# EAGLE board VHF-Superregen-2-Transistor-old (EAGLE 7.6.0)
A Superregen Receiver for FM broadcast or Aircraft band AM reception http://www.ke3ij.com/superrgn.htm
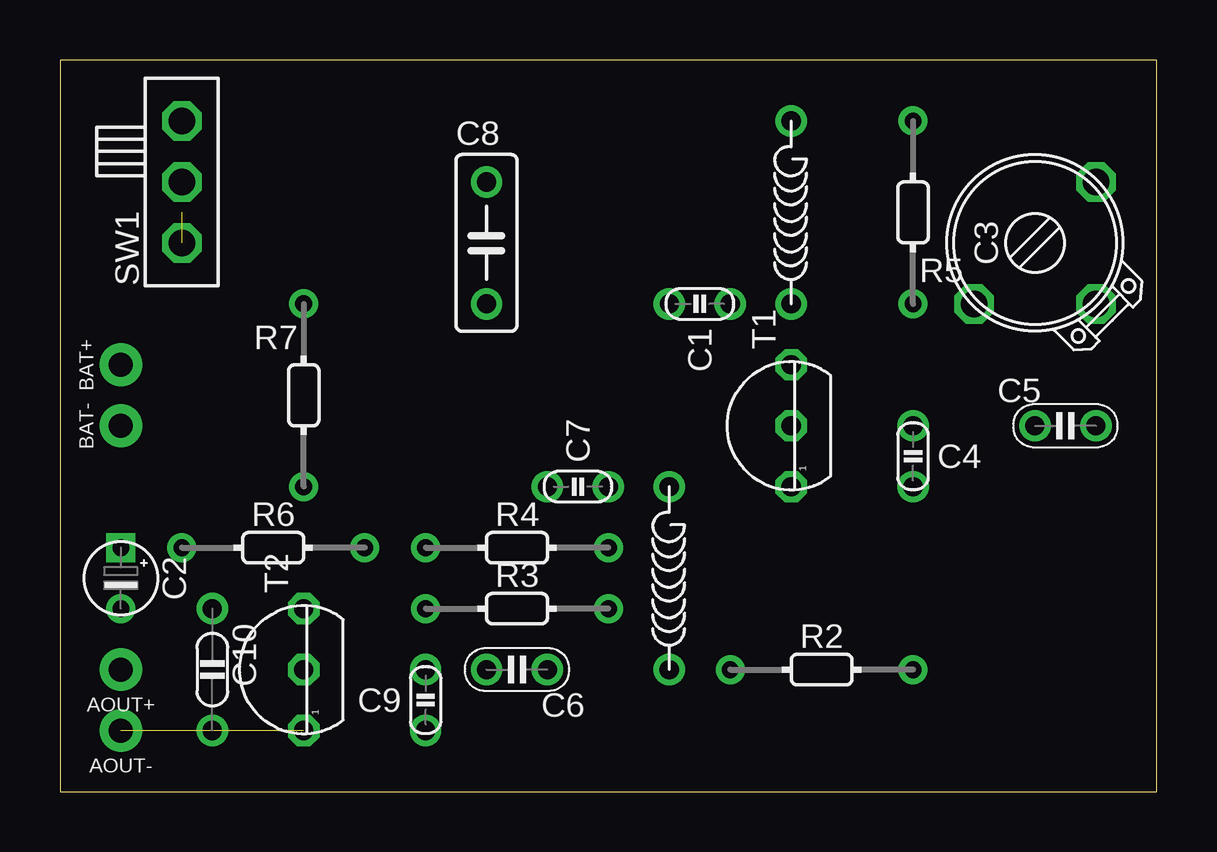
[diagram p0: board, top side]
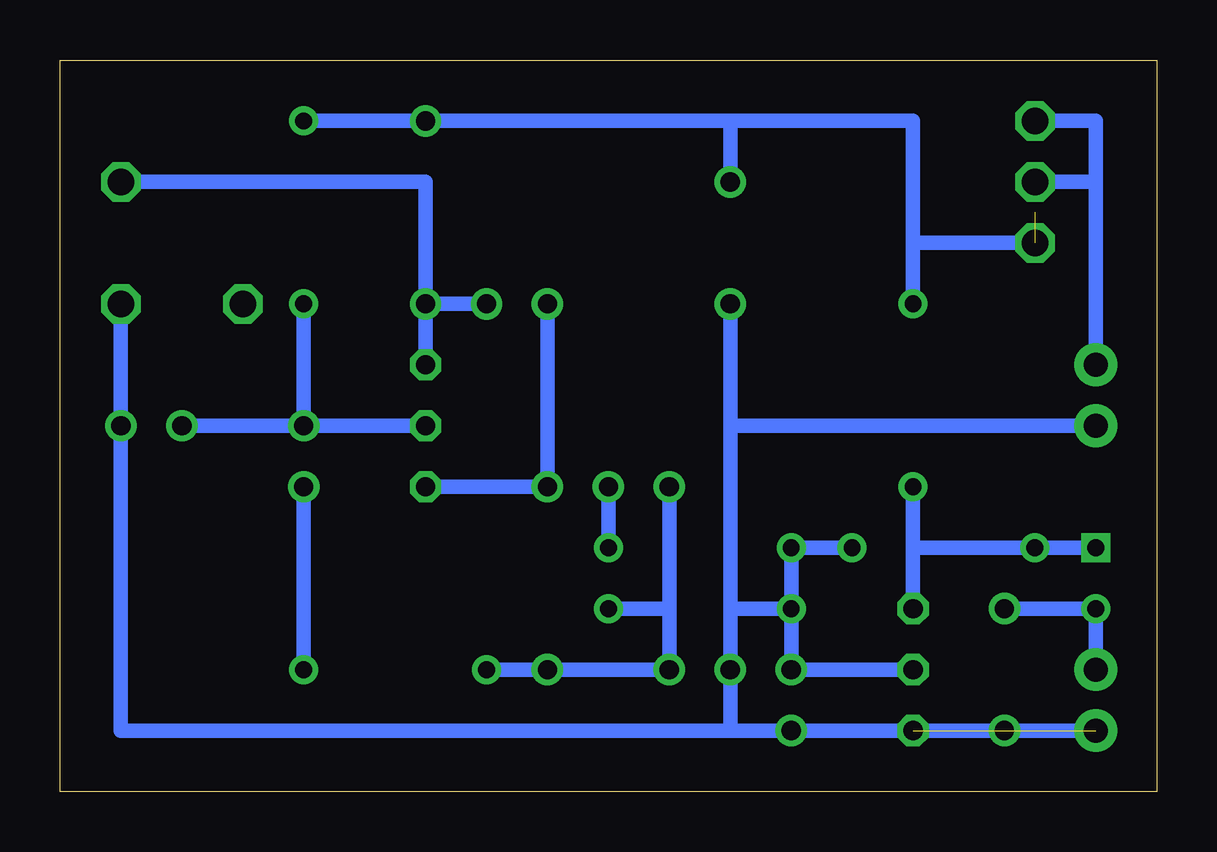
[diagram p1: board, bottom side, seen from below]

Size 45.72 x 30.48 mm. Coordinates in mm from the lower left corner, seen from the top.
Outline: 0,0 45.72,0 45.72,30.48 0,30.48 0,0
Copper layers (1*16): Top 0.035mm / dielectric 1.5mm / Bottom 0.035mm
Design rules "default": minimum track width 10mil, minimum drill 24mil, track to track 8mil, track to pad 8mil, pad to pad 8mil, via to via 8mil, smd to smd 8mil, copper to edge 40mil, drill to drill 8mil, minimum pad ring 10mil, minimum via ring 8mil, stop-mask expansion 4mil, vias tented up to drill 0mil, thermal gap 10mil
Net classes: 0 default: width 0.61 mm

## Footprints (pad centres in the part's own frame; a part is rotated, then mirrored left to right if it is on the bottom)
SPAD = drill 1 pad 1.778: 1 0,0
C025-015X024 = drill 0.8: 1 0,1.27; 2 0,-1.27
E2,5-3 = drill 0.7 square: + 0,1.27 | drill 0.7: - 0,-1.27
TRIM-2222-808 = drill 1.1 octagon: 1 -2.54,2.54; 2 -2.54,-2.54; 3 2.54,-2.54
C025-020X036 = drill 0.8: 1 0,0; 2 2.54,0
C050-025X075 = drill 0.8: 1 2.54,0; 2 -2.54,0
C050-020X036 = drill 0.8: 1 -2.54,0; 2 2.54,0
L-02/7V = drill 0.8: 1 0,3.81; 2 0,-3.81
0202/7 = drill 0.7: 1 0,3.81; 2 0,-3.81
0202/7-V = drill 0.7: 1 0,-3.81; 2 0,3.81
SLSW-1P2T-H = drill 1.1 pad 1.524 octagon: 1 2.54,0; 2 0,0; 3 -2.54,0
TO92 = drill 0.8 octagon: 1 -2.54,0; 2 0,0; 3 2.54,0

## Placement (x,y rotation side)
AOUT+  SPAD  [SPAD]  2.54,5.08 90 top
AOUT-  SPAD  [SPAD]  2.54,2.54 90 top
BAT+  SPAD  [SPAD]  2.54,17.78 0 top
BAT-  SPAD  [SPAD]  2.54,15.24 0 top
C1  7p  [C025-015X024]  26.67,20.32 90 top
C2  2.2u  [E2,5-3]  2.54,8.89 0 top
C3  15p  [TRIM-2222-808]  40.64,22.86 90 top
C4  470n  [C025-015X024]  35.56,13.97 180 top
C5  1n  [C025-020X036]  40.64,15.24 0 top
C6  1n  [C025-020X036]  20.32,5.08 180 top
C7  470n  [C025-015X024]  21.59,12.7 270 top
C8  100n  [C050-025X075]  17.78,22.86 90 top
C9  10n  [C025-015X024]  15.24,3.81 0 top
C10  47n  [C050-020X036]  6.35,5.08 270 top
L1  6turns on d=0.7mm  [L-02/7V]  30.48,24.13 180 top
L2  6 turns #22 on BIC pen  [L-02/7V]  25.4,8.89 180 top
R2  12k  [0202/7]  31.75,5.08 270 top
R3  10k  [0202/7]  19.05,7.62 270 top
R4  22k  [0202/7]  19.05,10.16 270 top
R5  330k  [0202/7-V]  35.56,24.13 180 top
R6  220k  [0202/7]  8.89,10.16 270 top
R7  4.7k  [0202/7-V]  10.16,16.51 0 top
SW1  SL-SW-1P-2T-H  [SLSW-1P2T-H]  5.08,25.4 90 top
T1  2N3904  [TO92]  30.48,15.24 90 top
T2  2N3904  [TO92]  10.16,5.08 90 top

## Library data of the parts
AOUT+ AOUT- BAT+ BAT- = pad
C1 C2 C4-C10 = c
C3 = cap-trim
L1 L2 R2-R7 = r
SW1 = sw
T1 T2 = t

## Nets
GND: AOUT-.1 BAT-.1 C3.2 C5.2 C6.2 C8.2 C9.2 C10.2 R3.2 T2.1
N$1: C1.2 C3.3 L1.1 T1.3
N$2: C1.1 L2.2 T1.1
N$3: C8.1 L1.2 R5.1 R7.2 SW1.3
N$4: C4.2 C5.1 R5.2 T1.2
N$5: C2.+ R6.2 R7.1 T2.3
N$6: C6.1 C7.2 L2.1 R2.2 R3.1
N$7: C4.1 R2.1
N$8: C7.1 R4.1
N$9: BAT+.1 SW1.1 SW1.2
N$10: C9.1 R4.2 R6.1 T2.2
N$11: AOUT+.1 C2.- C10.1

## Tracks (layer width: path | path; a pad name or v marks a point on that pad's centre or on a via)
GND  (2 unrouted)
  Bottom 0.61: 17.78,2.54 43.18,2.54 C5.2 C3.2 | 17.78,2.54 C6.2 | 17.78,15.24 C6.2 | BAT-.1 17.78,15.24 | 17.78,15.24 C8.2 | C6.2 17.78,7.62 R3.2 | 17.78,2.54 C9.2 AOUT-.1
N$1
  Bottom 0.61: C1.2 L1.1 | C3.3 30.48,25.4 L1.1 | T1.3 L1.1
N$2
  Bottom 0.61: C1.1 L2.2 T1.1
N$3  (1 unrouted)
  Bottom 0.61: R5.1 L1.2 17.78,27.94 | 17.78,27.94 10.16,27.94 10.16,22.86 | 17.78,27.94 C8.1 | R7.2 10.16,22.86 | 10.16,22.86 SW1.3
N$4
  Bottom 0.61: C4.2 C5.1 | C4.2 R5.2 | C4.2 T1.2
N$5
  Bottom 0.61: R7.1 10.16,10.16 | 10.16,10.16 R6.2 C2.+ | T2.3 10.16,10.16
N$6
  Bottom 0.61: 20.32,7.62 C6.1 R2.2 L2.1 | R3.1 20.32,7.62 | 20.32,7.62 C7.2
N$7
  Bottom 0.61: R2.1 C4.1
N$8
  Bottom 0.61: R4.1 C7.1
N$9
  Bottom 0.61: BAT+.1 2.54,25.4 | SW1.2 2.54,25.4 | 2.54,25.4 2.54,27.94 SW1.1
N$10
  Bottom 0.61: R6.1 R4.2 C9.1 T2.2
N$11
  Bottom 0.61: C10.1 C2.- AOUT+.1